# Altium PCB PCB1.PcbDoc
Units mil, origin at the board's own origin, x right, y up, seen from the top; angles counter-clockwise.
Board outline 2750 x 2515 mil, 4 copper layers (Top Layer, GND, VCC, Bottom Layer), stack 23.756 mil thick; 13 components, 9 nets, 221 pads, 11 vias.
Unrouted connection lines stored in the file: 18.
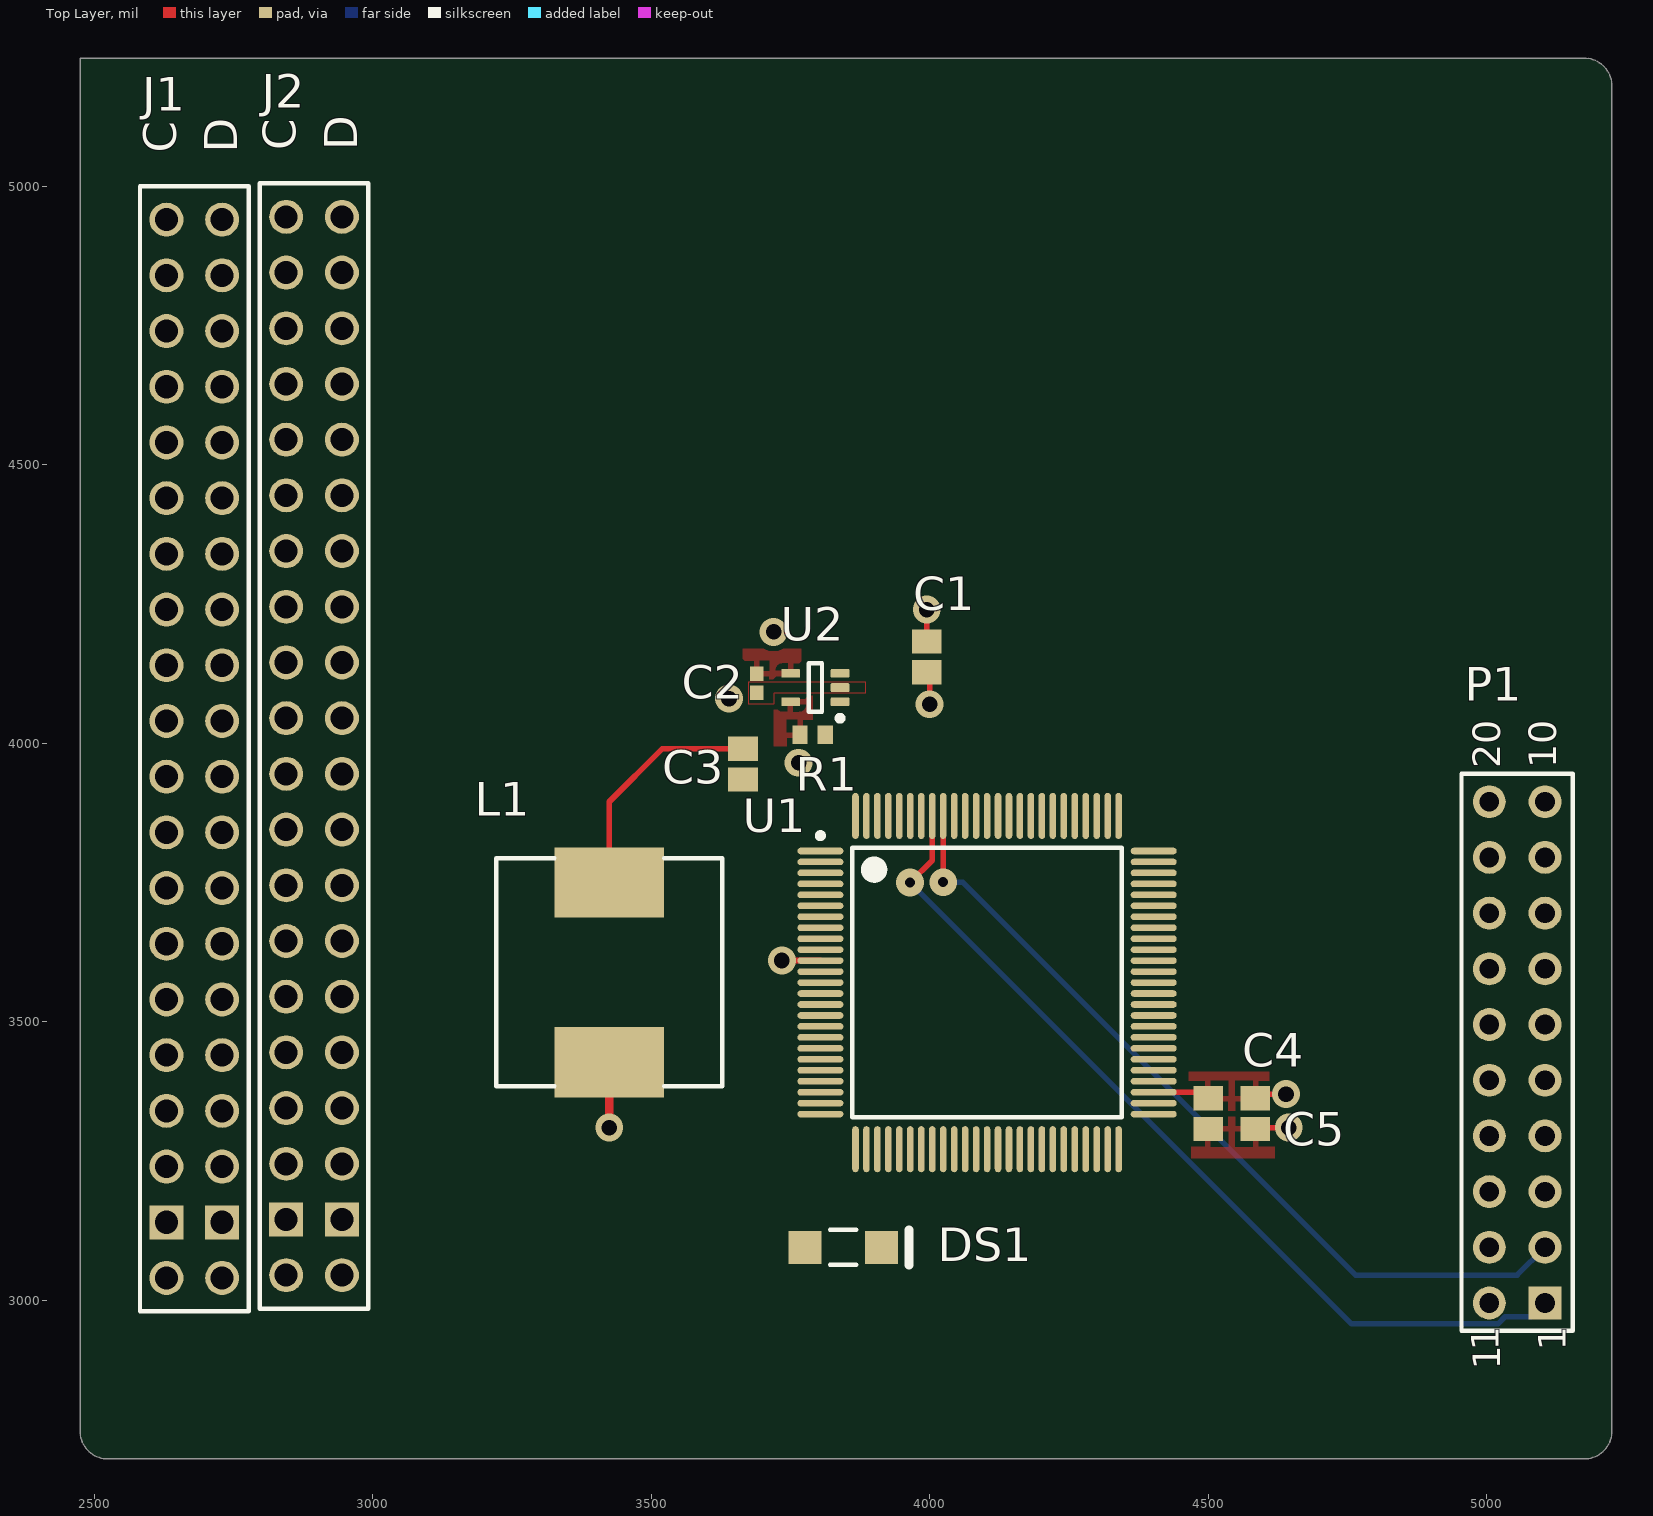
[diagram p0: Top Layer view]
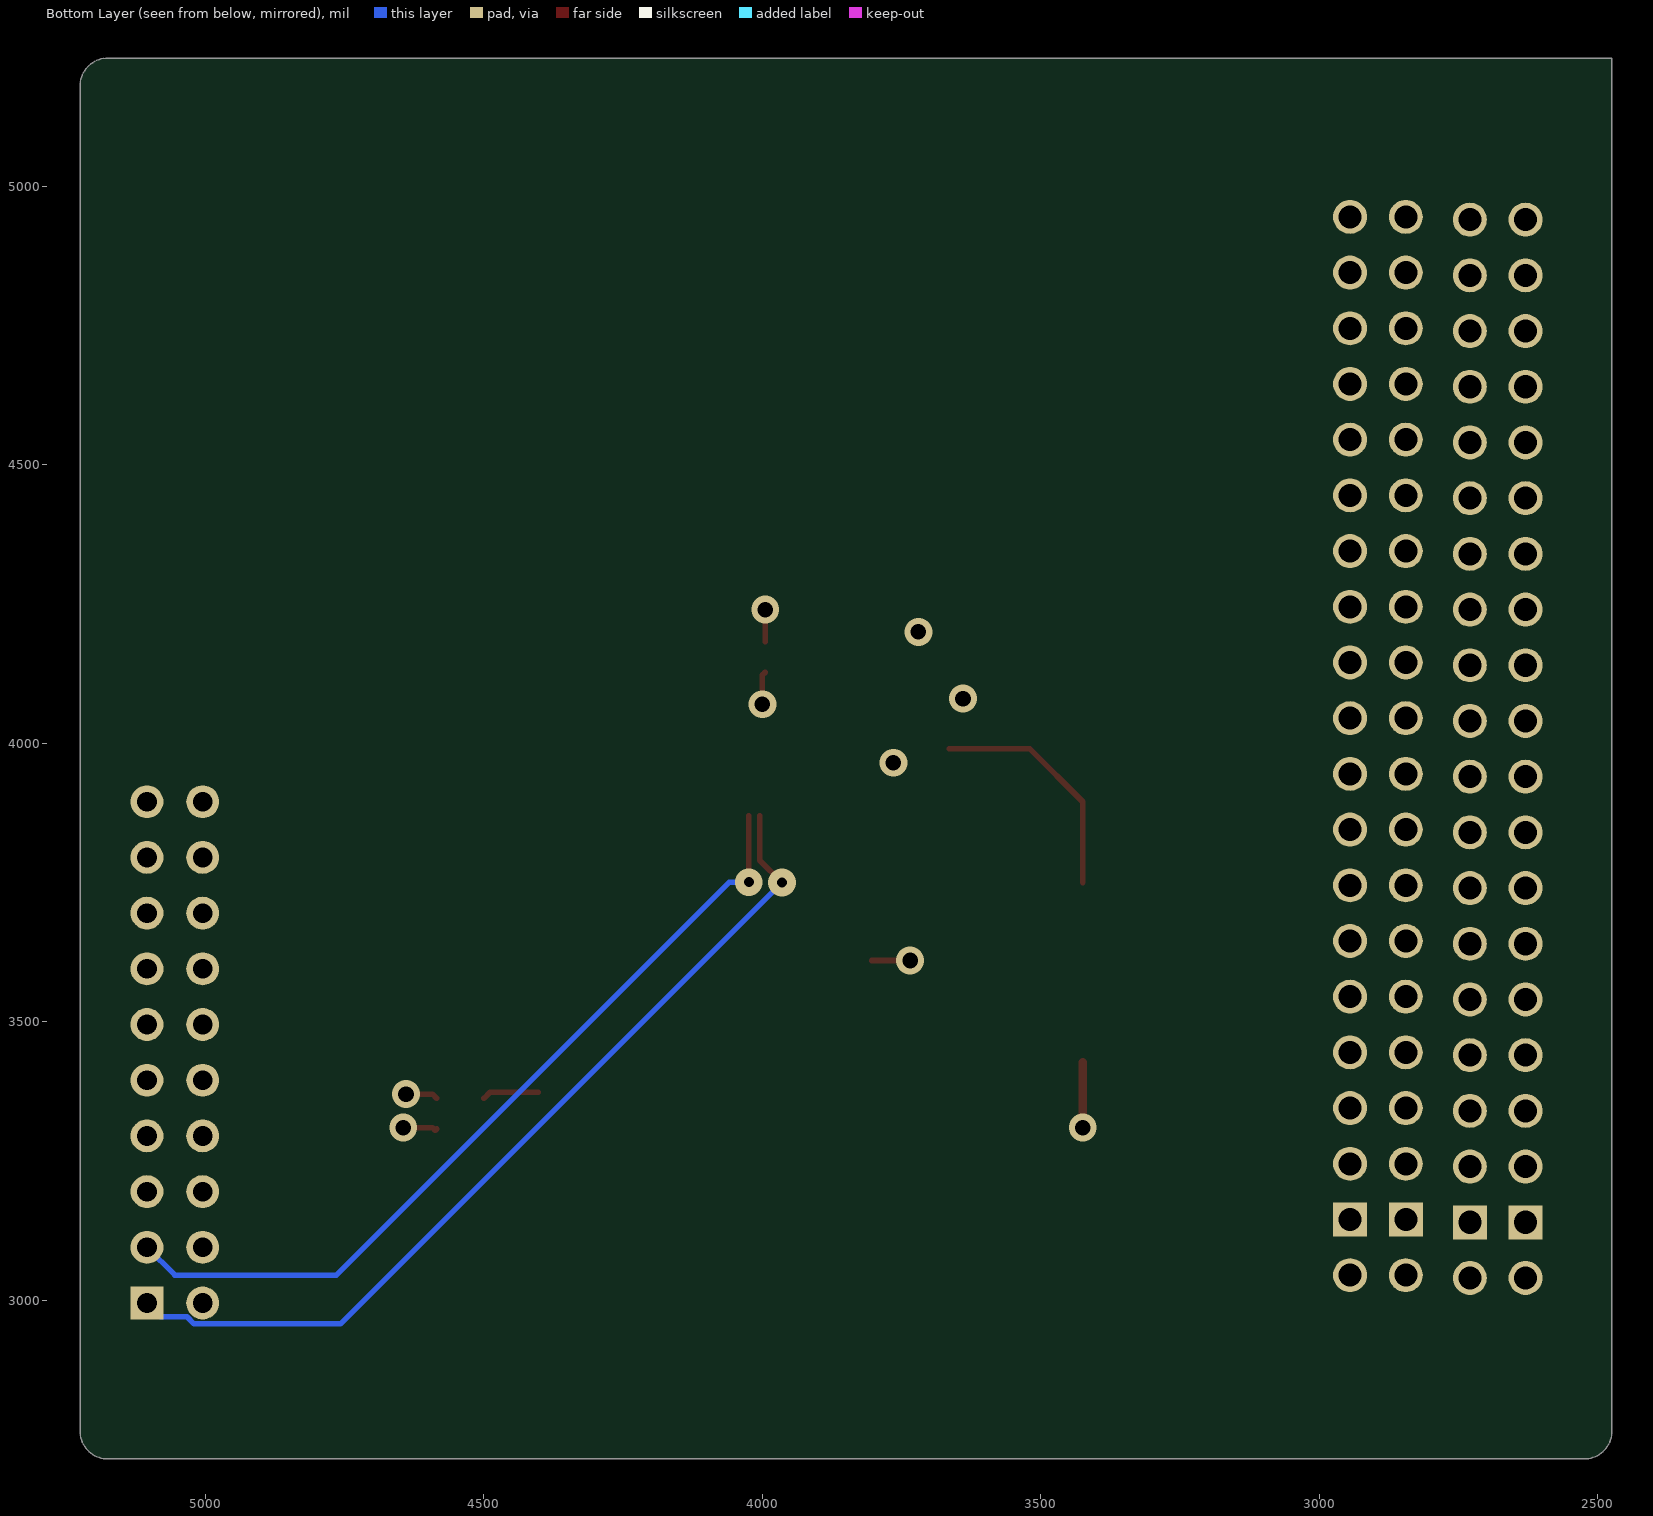
[diagram p1: Bottom Layer view, seen from below]
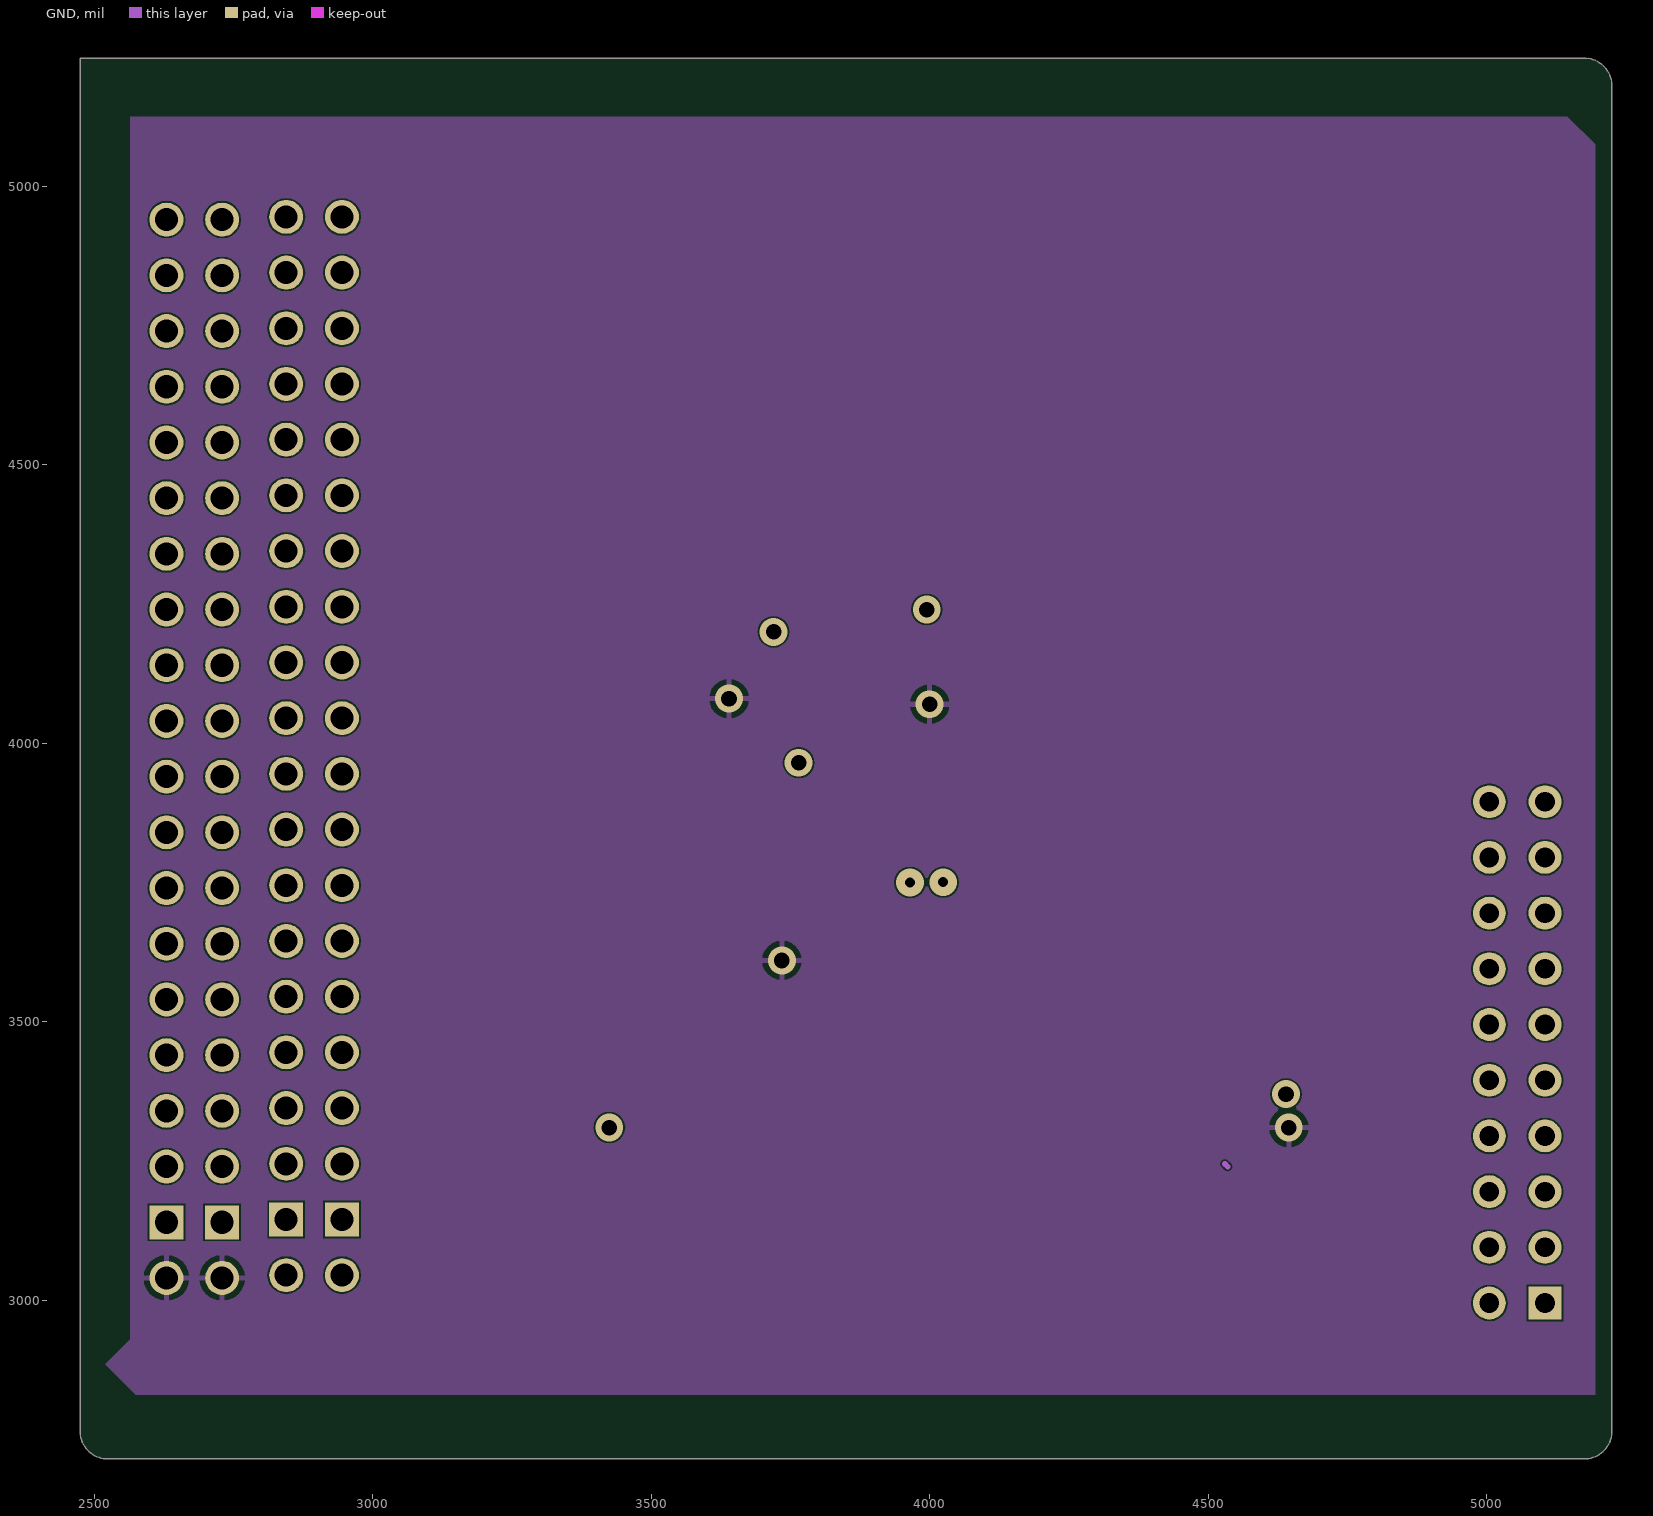
[diagram p2: GND]
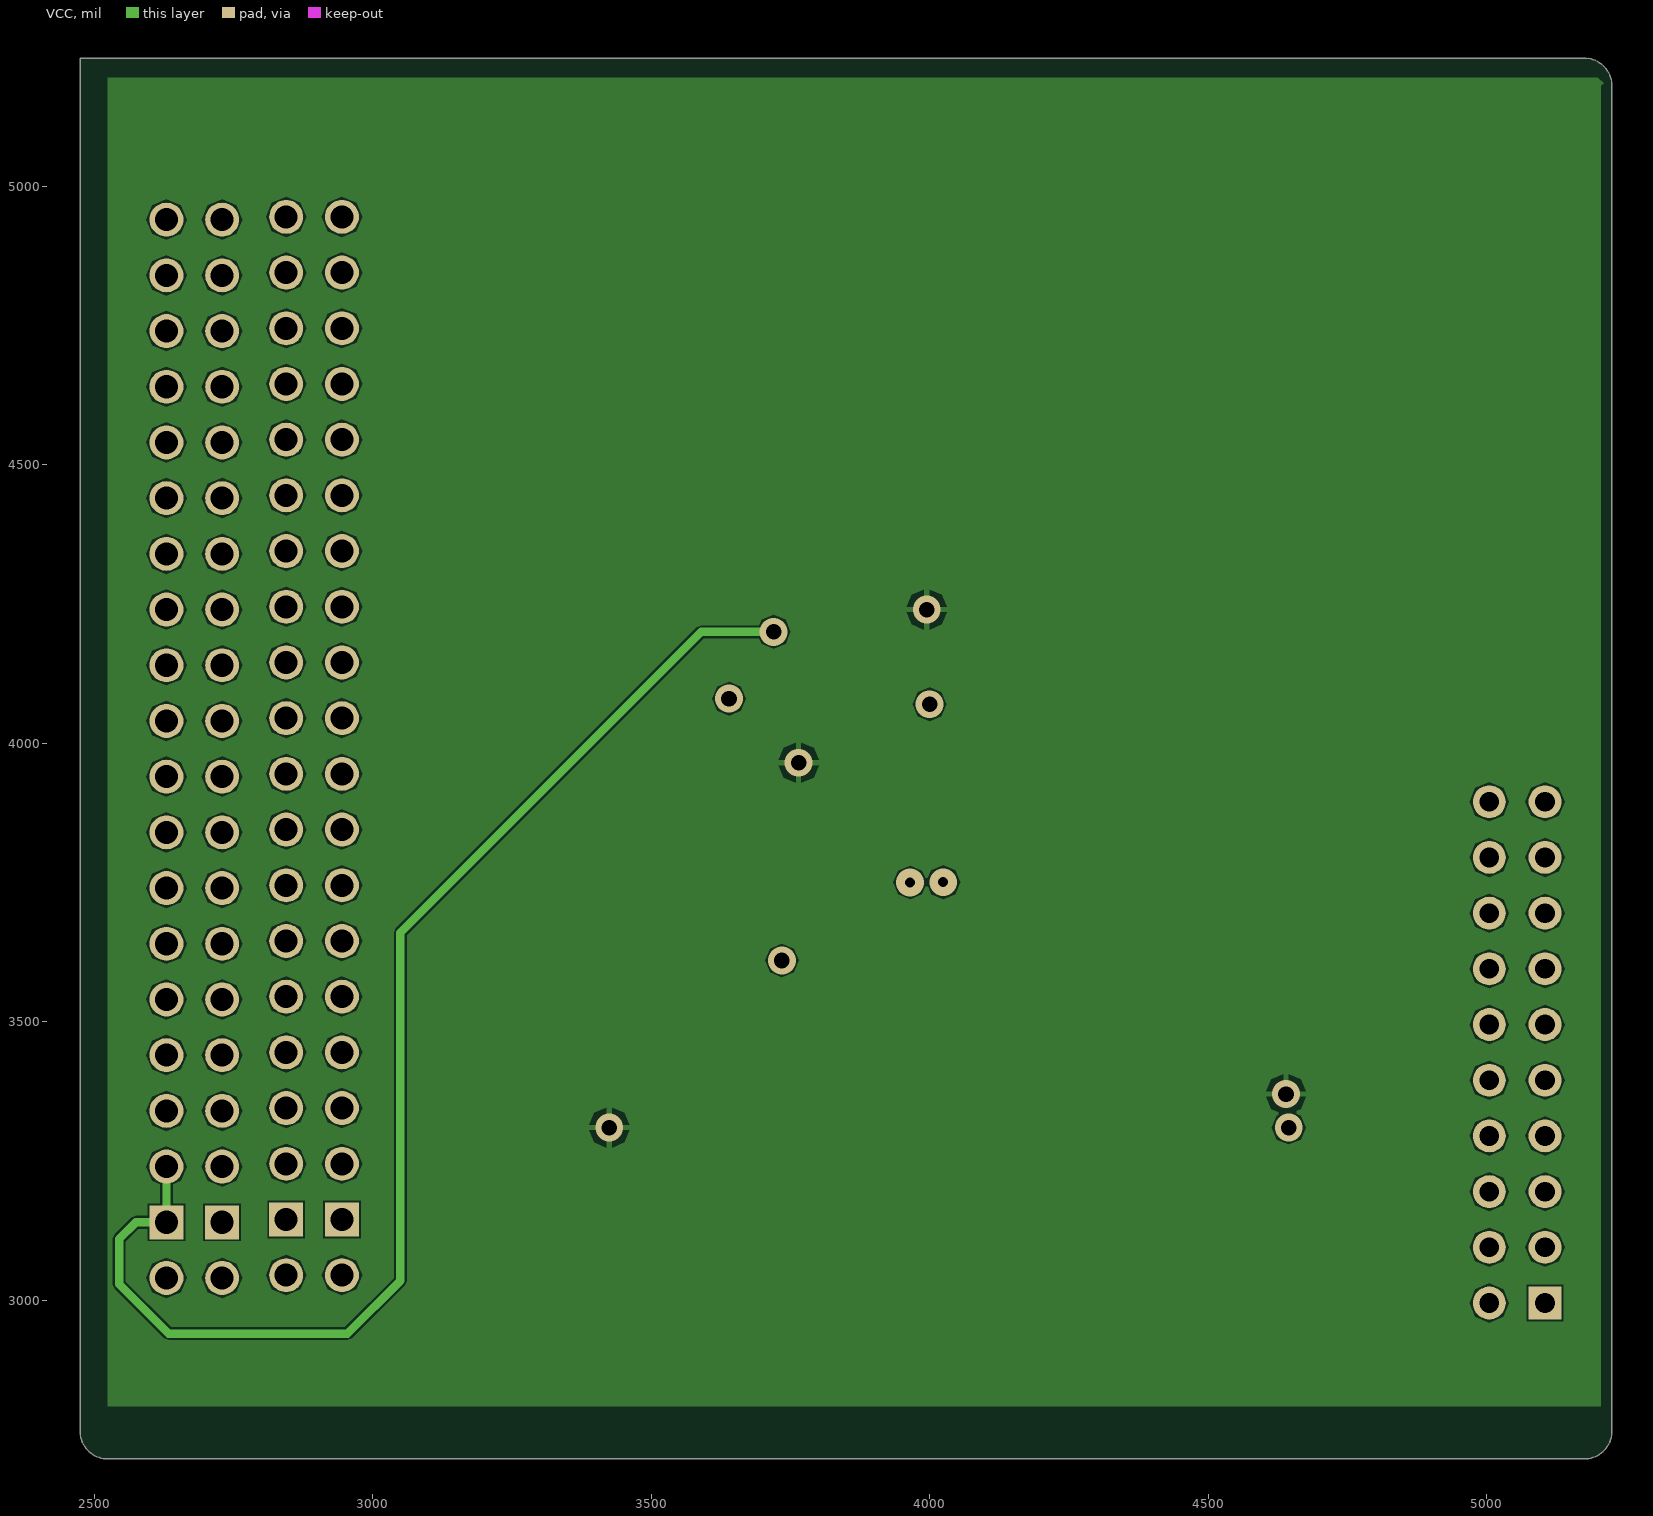
[diagram p3: VCC]

## Layer stack, top to bottom
Top Solder: solder mask 0.4, Solder Resist, Dk 3.5
Top Layer: signal copper 1.4
Dielectric 2: prepreg 2.8, PP-006, Dk 4.1
GND: signal copper 1.3779
Dielectric 1: dielectric 12.6, FR-4, Dk 4.8
VCC: signal copper 1.3779
Dielectric 3: prepreg 2.8, PP-006, Dk 4.1
Bottom Layer: signal copper 1.4
Bottom Solder: solder mask 0.4, Solder Resist, Dk 3.5

## Board outline
2525,2715 cw(c2525,2765) 2475,2765 2475,5230 5175,5230 cw(c5175,5180) 5225,5180 5225,2765 cw(c5175,2765) 5175,2715

## Design rules (kind name [scope] priority, off if disabled: settings)
Clearance CLEARANCE_11 [InNamedPolygon('GND_L01_P020')] p1: gap=10 ignorepadtopadclearanceinfootprint=FALSE except(0: Arc-Hole Track-Hole SMDPad-Hole THPad-Hole Via-Hole Fill-Hole Poly-Hole Region-Hole Text-Hole; 3: Arc-Arc Arc-Track Arc-THPad Track-Track Track-THPad)
Clearance Clearance_10 [InNamedPolygon('GND_L01_P020')] p2: gap=10 ignorepadtopadclearanceinfootprint=FALSE except(0: Arc-Hole Track-Hole SMDPad-Hole THPad-Hole Via-Hole Fill-Hole Poly-Hole Region-Hole Text-Hole; 3: Arc-THPad)
Clearance Clearance_9 [InNamedPolygon('VCC_REG_L01_P074')] p3: gap=10 ignorepadtopadclearanceinfootprint=TRUE except(0: Arc-Hole Track-Hole SMDPad-Hole THPad-Hole Via-Hole Fill-Hole Poly-Hole Region-Hole Text-Hole)
Clearance Clearance_8 [InNamedPolygon('VCC_REG_L01_P074')] p4: gap=0 ignorepadtopadclearanceinfootprint=FALSE
Clearance Clearance_7 [InNamedPolygon('VCC_L01_P026')] p5: gap=3 ignorepadtopadclearanceinfootprint=FALSE
Clearance Clearance_6 [InNamedPolygon('GND_L02_P000')] p6: gap=4 ignorepadtopadclearanceinfootprint=TRUE
Clearance Clearance_5 [InNamedPolygon('GND_L02_P000')] p7: gap=4 ignorepadtopadclearanceinfootprint=FALSE
Clearance Clearance_4 [InNamedPolygon('VCC_L03_P001')] p8: gap=4 ignorepadtopadclearanceinfootprint=FALSE
Clearance Clearance_3 [InNamedPolygon('GND_L02_P000')] p9: gap=3 ignorepadtopadclearanceinfootprint=FALSE
Clearance Clearance_2 [InNamedPolygon('VCC_L03_P001')] p10: gap=4 ignorepadtopadclearanceinfootprint=FALSE
Clearance Clearance_1 [InNamedPolygon('GND_L02_P000')] p11: gap=4 ignorepadtopadclearanceinfootprint=FALSE
Clearance [All] p12: gap=3 ignorepadtopadclearanceinfootprint=FALSE
PolygonConnect [All] p1: connectstyle=Relief reliefconductorwidth=10 reliefentries=4 polygonreliefangle="90 Angle" airgapwidth=10
RoomDefinition Sheet2 [InComponentClass('Sheet2')] p1: confinementstyle=ConfineIn formatcopy=TRUE lockcomponents=FALSE outline 2415,2785 5230,2785 5230,5235 2415,5235
RoutingVias [All] p1: holewidth=28 width=50 viastyle="Through Hole" minholewidth=28 minwidth=50 maxholewidth=28 maxwidth=50
SolderMaskExpansion [All] p1: expansion=4
Width [InNet('VCC')] p1: maxlimit=25 minlimit=10 preferedwidth=15
30 further rules are at their usual default settings.

## Components (designator, comment, footprint, x,y, rotation, side; value= is the part's Value field where it differs from the comment)
C1 "C0805C474K4RACTU" CAPC2013X140X50LL20T25 3995,4155 r90 top
C2 "GRM155R61A105KE15D" CAPC1005X55X25NL05T10 3690,4107.68 r90 top
C3 "C0805C474K4RACTU" CAPC2013X140X50LL20T25 3665,3962.44 r90 top
C4 "C0805C474K4RACTU" CAPC2013X140X50LL20T25 4585,3335 r90 top
C5 "C0805C474K4RACTU" CAPC2013X140X50LL20T25 4500,3335 r90 top
DS1 "HSMH-C150" AVAG-HSMX-C150_V 3845,3095 r0 top
J1 "PC104-CN-2P-F-R40" BTB2-54-V40F-04 2630,3140 r90 top
J2 "PC104-CN-2P-F-R40" BTB2-54-V40F-04 2845,3145 r90 top
L1 "7687714681" 1060 3425.01,3588.59 r0 top
P1 "Header 10" HDR2X10_CEN 5105,2995 r90 top
R1 "CRCW0603100KFKEA" RESC1609X50X30LL10T20 3790,4015 r180 top
U1 "ATmega2560-16AU" 100A_M 4103.23,3570.32 r0 top
U2 "TPS79733DCKT" DCK0005A_N 3795,4100 r180 top

## Footprints (in the part's own frame and the unit in brackets; to place one, negate y for a bottom-side part, rotate by r counter-clockwise, add the part's x,y. Pads: shape width x height; smd on the part's side, far side on the other; paste and mask are expansions set on the pad)
100A_M [mm] "Thin QFP, 100-Leads, Body 14x14mm, Pitch 0.5mm, IPC Low Density"
  oval 2.1x0.3 smd: 1(-7.6,6) 2(-7.6,5.5) 3(-7.6,5) 4(-7.6,4.5) 5(-7.6,4) 6(-7.6,3.5) 7(-7.6,3) 8(-7.6,2.5) 9(-7.6,2) 10(-7.6,1.5) 11(-7.6,1) 12(-7.6,0.5) 13(-7.6,0) 14(-7.6,-0.5) 15(-7.6,-1) 16(-7.6,-1.5) 17(-7.6,-2) 18(-7.6,-2.5) 19(-7.6,-3) 20(-7.6,-3.5) 21(-7.6,-4) 22(-7.6,-4.5) 23(-7.6,-5) 24(-7.6,-5.5) 25(-7.6,-6) 51(7.6,-6) 52(7.6,-5.5) 53(7.6,-5) 54(7.6,-4.5) 55(7.6,-4) 56(7.6,-3.5) 57(7.6,-3) 58(7.6,-2.5) 59(7.6,-2) 60(7.6,-1.5) 61(7.6,-1) 62(7.6,-0.5) 63(7.6,0) 64(7.6,0.5) 65(7.6,1) 66(7.6,1.5) 67(7.6,2) 68(7.6,2.5) 69(7.6,3) 70(7.6,3.5) 71(7.6,4) 72(7.6,4.5) 73(7.6,5) 74(7.6,5.5) 75(7.6,6)
  oval 0.3x2.1 smd: 26(-6,-7.6) 27(-5.5,-7.6) 28(-5,-7.6) 29(-4.5,-7.6) 30(-4,-7.6) 31(-3.5,-7.6) 32(-3,-7.6) 33(-2.5,-7.6) 34(-2,-7.6) 35(-1.5,-7.6) 36(-1,-7.6) 37(-0.5,-7.6) 38(0,-7.6) 39(0.5,-7.6) 40(1,-7.6) 41(1.5,-7.6) 42(2,-7.6) 43(2.5,-7.6) 44(3,-7.6) 45(3.5,-7.6) 46(4,-7.6) 47(4.5,-7.6) 48(5,-7.6) 49(5.5,-7.6) 50(6,-7.6) 76(6,7.6) 77(5.5,7.6) 78(5,7.6) 79(4.5,7.6) 80(4,7.6) 81(3.5,7.6) 82(3,7.6) 83(2.5,7.6) 84(2,7.6) 85(1.5,7.6) 86(1,7.6) 87(0.5,7.6) 88(0,7.6) 89(-0.5,7.6) 90(-1,7.6) 91(-1.5,7.6) 92(-2,7.6) 93(-2.5,7.6) 94(-3,7.6) 95(-3.5,7.6) 96(-4,7.6) 97(-4.5,7.6) 98(-5,7.6) 99(-5.5,7.6) 100(-6,7.6)
  silkscreen extent -7.72,-6.15 6.15,6.82, body extent -7,-7 7,7, height 1.6
1060 [mm] "Precision Wire Wound Inductor, 2-Leads, Body 10.0x10.0mm, IPC Medium Density"
  rect 5x3.2 smd: 1(0,4.1) 2(0,-4.1)
  silkscreen extent -5.15,-5.2 5.15,5.2, body extent -6,-6 6,6, height 5.65
AVAG-HSMX-C150_V [mm] "SMD, 2-Leads, Body 3.2x1.6mm"
  rect 1.5x1.5 smd: 1(-1.75,0) 2(1.75,0)
  silkscreen extent -0.6,-0.8 3,0.8, body extent -1.6,-0.8 1.6,0.8, height 1.1
BTB2-54-V40F-04 [mm] "Board-to-Board Connector, PC104 CD ISA, Stackthrough, Vertical, 2-Row, 40-Postion, Pitch 2.54mm, Receptacle"
  round 1.55 hole 1.05: C0(-2.54,0) C2(2.54,0) C3(5.08,0) C4(7.62,0) C5(10.16,0) C6(12.7,0) C7(15.24,0) C8(17.78,0) C9(20.32,0) C10(22.86,0) C11(25.4,0) C12(27.94,0) C13(30.48,0) C14(33.02,0) C15(35.56,0) C16(38.1,0) C17(40.64,0) C18(43.18,0) C19(45.72,0) D0(-2.54,-2.54) D2(2.54,-2.54) D3(5.08,-2.54) D4(7.62,-2.54) D5(10.16,-2.54) D6(12.7,-2.54) D7(15.24,-2.54) D8(17.78,-2.54) D9(20.32,-2.54) D10(22.86,-2.54) D11(25.4,-2.54) D12(27.94,-2.54) D13(30.48,-2.54) D14(33.02,-2.54) D15(35.56,-2.54) D16(38.1,-2.54) D17(40.64,-2.54) D18(43.18,-2.54) D19(45.72,-2.54)
  rect 1.55x1.55 hole 1.05: C1(0,0) D1(0,-2.54)
  silkscreen extent -4.07,-3.74 47.24,1.21, body extent -4.14,-3.74 47.32,1.21, height 11.05
CAPC1005X55X25NL05T10 [mm] "Chip Capacitor, 2-Leads, Body 1.00x0.50mm, IPC Medium Density"
  rect 0.66x0.62 smd: 1(-0.44,0) 2(0.44,0)
  body extent -0.53,-0.28 0.53,0.27, height 0.55
CAPC2013X140X50LL20T25 [mm] "Chip Capacitor, 2-Leads, Body 2.00x1.25mm, IPC High Density"
  rect 1.1x1.35 smd: 1(-0.7,0) 2(0.7,0)
  body extent -1.1,-0.72 1.1,0.72, height 1.4
DCK0005A_N [mm] "SOT23, 5-Leads, Body 2.15x1.4mm, Pitch 0.65mm, IPC Medium Density"
  rrect25% 0.85x0.4 smd: 1(-1.125,0.65) 2(-1.125,0) 3(-1.125,-0.65) 4(1.125,-0.65) 5(1.125,0.65)
  silkscreen extent -1.25,-1.1 0.3,1.52, body extent -1.14,-1 1.14,1, height 0.94
HDR2X10_CEN [mm] "Connector; Header; 10x2 Position"
  rect 1.5x1.5 hole 0.9: 1(0,0)
  round 1.5 hole 0.9: 2(2.54,0) 3(5.08,0) 4(7.62,0) 5(10.16,0) 6(12.7,0) 7(15.24,0) 8(17.78,0) 9(20.32,0) 10(22.86,0) 11(0,2.54) 12(2.54,2.54) 13(5.08,2.54) 14(7.62,2.54) 15(10.16,2.54) 16(12.7,2.54) 17(15.24,2.54) 18(17.78,2.54) 19(20.32,2.54) 20(22.86,2.54)
  silkscreen extent -1.27,-1.27 24.13,3.81
RESC1609X50X30LL10T20 [mm] "Chip Resistor, 2-Leads, Body 1.55x0.85mm, IPC High Density"
  rect 0.7x0.85 smd: 1(-0.575,0) 2(0.575,0)
  body extent -0.82,-0.48 0.82,0.48, height 0.5

## Part data
C1 C3 C4 C5: library part CMP-2007-03296-1, Manufacturer=Kemet, Part Number=C0805C474K4RACTU
C2: library part CMP-2008-04556-1, Manufacturer=Murata, Part Number=GRM155R61A105KE15D
DS1: library part CMP-2000-06426-1, "LED Uni-Color Red, 65 mW, 25 mA, -40 to 85 degC, 2-Pin SMD, RoHS, Tape and Reel", Emitting Color=Red, Forward Current=25mA, Forward Voltage=2.6V, Manufacturer=Avago, Operating Temperature Classification=Industrial, Operating Temp Range=-40Cto85C, Package Description="2-Pin Surface Mount Device, Body 3.2 x 1.6 mm", Package Reference=HSMX-C150, Package Type=ChipLed, Power Dissipation=78W, Reverse Voltage=5V, Test Current (It)=20mA, Chip Material=GaAlAs, Datasheet URL=http://media.digikey.com/pdf/Data%20Sheets/Avago%20PDFs/HSMz-Czzz.pdf, Datasheet Version=03/2012, DELETED=Compliant, Dominant Wave Length=639nm, High Brightness=No, Lens Dimensions=2x1.6x0.6mm, Lens Type=ColorlessDiffused, Luminous Intensity=17mcd, Lum Intensity=17mcd, Main Category=ChipLED, Manufacturer URL=http://www.avagotech.com/, Mounting=SurfaceMount, Mounting Technology=SurfaceMount, Number of  Elements=1, Packaging=TapeandReel, Peak Wavelength=660nm, Pin Count=2, Product Depth (mm)=1.6mm, Product Height (mm)=1.1mm, Product Length (mm)=3.2mm, Rad Hardened=No, Shape Type=Rectangular, Type=Uni-Color, Viewing Angle=170deg
J1 J2: library part CMP-0001-00107-1, "Board-to-Board Connector, PC104 CD ISA, Stackthrough, Vertical, 2-Row, 40-Postion, Pitch 2.54mm, Receptacle", Package Reference=BTB2-54-V40F-04, ClassName="Board Template Connector", Mating Connector="Harwin-M20-6102005 (stackthrough)", Publisher=Altium
L1: library part CMP-1387-00003-1, "SMD Power Inductor WE-PD HV, L=680 µH", Inductance="680 µH", Manufacturer="Wuerth Elektronik", ComponentLink1Description="Manufacturer URL", ComponentLink1URL=http://www.we-online.com, ComponentLink2Description=Datasheet, ComponentLink2URL=http://www.we-online.de/katalog/media/pdf/7687714681.pdf, PackageReference=1060, PartNumber=7687714681
P1: "Header, 10-Pin", LatestRevisionDate=17-Jul-2002, LatestRevisionNote="Re-released for DXP Platform.", Publisher="Altium Limited"
R1: library part CMP-2000-03820-1, Manufacturer="Vishay Dale", Part Number=CRCW0603100KFKEA
U1: library part CMP-0095-00210-2, "8-bit AVR Microcontroller, 4.5-5.5V, 16MHz, 256KB Flash, 4KB EEPROM, 8KB SRAM, 86 GPIO pins, 100-pin TQFP, Industrial Grade (-40°C to 85°C), Pb-Free", Code_JEDEC=MS-026-AED, ComponentLink1Description="Manufacturer URL", ComponentLink1URL=http://www.atmel.com/, ComponentLink2Description="ATmega640/1280/1281/2560/2561 Datasheet", ComponentLink2URL=http://www.atmel.com/dyn/resources/prod_documents/doc2549.pdf, ComponentLink3Description="ATmega640/1280/1281/2560/2561 Summary", ComponentLink3URL=http://www.atmel.com/dyn/resources/prod_documents/2549S.pdf, DatasheetVersion="revN, May-2011", PackageDescription="100-Pin Thin Profile Plastic Quad Flat Pack (TQFP), 14 x 14 x 1.0 mm Body, 0.5 mm Pitch", PackageReference=100A, PackageVersion="revD, Oct-2010", RevisionNote="DatasheetVersion & PackageVersion updated. URLs added."
U2: library part CMP-0394-00889-2, "Single Output LDO, 50 mA, Fixed 3.3 V Output, 1.8 to 5.5 V Input, with Low IQ, 5-pin SC70 (DCK), -40 to 85 degC, Green (RoHS & no Sb/Br)", Manufacturer="Texas Instruments", Power Good=TRUE, Rating=Catalog, Accuracy(%)=4, Code_JEDEC=MO-203, ComponentLink1Description="Manufacturer URL", ComponentLink1URL=http://www.ti.com/, ComponentLink2Description=Datasheet, ComponentLink2URL=http://www.ti.com/general/docs/lit/getliterature.tsp?genericPartNumber=TPS79733&fileType=pdf, ComponentLink3Description="Package Specification", ComponentLink3URL=http://www.ti.com/litv/pdf/mpds025f, DatasheetVersion=SLVS332H, Eco-Plan="Green (RoHS & no Sb/Br)", Fixed Output Options(V)=3.3, Iout(Max)(A)=0.05, Iq(Typ)(mA)=0.001, Mounting Technology="Surface Mount", PackageDescription="5-Pin Plastic Small-Outline, Body 2 x 1.25 mm, Pitch 0.65 mm", PackageReference=DCK0005A, PackageVersion=4093553-3/G, PartNumber=TPS79733DCKT, SubFamily="Single Channel LDO", Vdo(Typ)(mV)=105, Vin(Max)(V)=5.5, Vin(Min)(V)=1.8, Vout Adj(Max)(V)=3.3, Vout Adj(Min)(V)=3.3

## Via types
v1: diameter 50, hole 28, Top Layer to Bottom Layer, 9 vias
v2: diameter 50, hole 18, Top Layer to Bottom Layer, 2 vias

## Nets (pads, with @x,y where several pads share a name; then routed paths per layer and width w, separated by ;. In a path a pad name is that pad's centre, name@x,y a point inside that pad or via, vN(x,y) a via of type N, cw(c..) or ccw(c..) an arc to the next point about the centre after c; other vN are vias at no path point)
AVCC: C3.2 L1.1 U1.100 | length 424.4
  Top Layer w10: L1.1 3425,3895 3520,3990 C3.2
GND: C1.1 C2.1 C3.1 C4.1 C5.1 DS1.2 J1.C0 J1.D0 U1.11 U1.98 U1.99 U2.2 | length 221.5
  Top Layer w10: J1.D0@2721.63,3048.37 J1.D0 ; v1(3640,4080) v1@3650.82,4080 ; v1(3735,3610) 3803.7,3610 U1.11 ; C1.1 4000,4122.44 v1(4000,4070) ; C4.1 4587.44,3305 4592.44,3310 v1(4645,3310)
  GND w15: v1@4640,3305 v1(4645,3310)
NetP1_1: P1.1 U1.93 | length 1619.8
  Top Layer w10: v2(3965,3750) 4004.8,3789.8 U1.93
  Bottom Layer w10: v2(3965,3750) 4757.53,2957.47 5020.54,2957.47 5033.54,2970.47 5080.47,2970.47 P1.1
NetP1_2: P1.2 U1.92 | length 1512.5
  Top Layer w10: v2(4024.49,3750.51) U1.92
  Bottom Layer w10: v2(4024.49,3750.51) 4059.49,3750.51 4765,3045 5055,3045 P1.2
NetP1_3: P1.3 U1.91
NetP1_4: P1.4 U1.90
reset: R1.1 U1.30 U2.1
VCC: C2.2 DS1.1 J1.C1 J1.C2 U2.4 | length 2392.4
  Top Layer w15: v1@3710.53,4190 3720,4199.47 v1(3720,4200)
  VCC w15: J1.C2 J1.C1 2575,3140 2545,3110 2545,3028.79 2633.79,2940 2955,2940 3050,3035 3050,3660 3590,4200 v1(3720,4200)
VCC_reg: C1.2 C4.2 C5.2 L1.2 R1.2 U1.53 U2.5 | length 363.2
  Top Layer w10: C1.2 v1(3995,4240) ; U1.53 4489.09,3373.46 C5.2 ; C4.2 4592.44,3370 v1(4640,3370) v1@4627.56,3357.56
  Top Layer w15: v1(3425,3310) L1.2
  VCC w10: v1(3995,4240) v1@4002.65,4232.35
  other v1: 3765,3965
pads on no net: J1.C3 J1.C4 J1.C5 J1.C6 J1.C7 J1.C8 J1.C9 J1.C10 J1.C11 J1.C12 J1.C13 J1.C14 J1.C15 J1.C16 J1.C17 J1.C18 J1.C19 J1.D1 J1.D2 J1.D3 J1.D4 J1.D5 J1.D6 J1.D7 J1.D8 J1.D9 J1.D10 J1.D11 J1.D12 J1.D13 J1.D14 J1.D15 J1.D16 J1.D17 J1.D18 J1.D19 J2.C0 J2.C1 J2.C2 J2.C3 J2.C4 J2.C5 J2.C6 J2.C7 J2.C8 J2.C9 J2.C10 J2.C11 J2.C12 J2.C13 J2.C14 J2.C15 J2.C16 J2.C17 J2.C18 J2.C19 J2.D0 J2.D1 J2.D2 J2.D3 J2.D4 J2.D5 J2.D6 J2.D7 J2.D8 J2.D9 J2.D10 J2.D11 J2.D12 J2.D13 J2.D14 J2.D15 J2.D16 J2.D17 J2.D18 J2.D19 P1.5 P1.6 P1.7 P1.8 P1.9 P1.10 P1.11 P1.12 P1.13 P1.14 P1.15 P1.16 P1.17 P1.18 P1.19 P1.20 U1.1 U1.2 U1.3 U1.4 U1.5 U1.6 U1.7 U1.8 U1.9 U1.10 U1.12 U1.13 U1.14 U1.15 U1.16 U1.17 U1.18 U1.19 U1.20 U1.21 U1.22 U1.23 U1.24 U1.25 U1.26 U1.27 U1.28 U1.29 U1.31 U1.32 U1.33 U1.34 U1.35 U1.36 U1.37 U1.38 U1.39 U1.40 U1.41 U1.42 U1.43 U1.44 U1.45 U1.46 U1.47 U1.48 U1.49 U1.50 U1.51 U1.52 U1.54 U1.55 U1.56 U1.57 U1.58 U1.59 U1.60 U1.61 U1.62 U1.63 U1.64 U1.65 U1.66 U1.67 U1.68 U1.69 U1.70 U1.71 U1.72 U1.73 U1.74 U1.75 U1.76 U1.77 U1.78 U1.79 U1.80 U1.81 U1.82 U1.83 U1.84 U1.85 U1.86 U1.87 U1.88 U1.89 U1.94 U1.95 U1.96 U1.97 U2.3
copper on no net: | length 12.1
  GND w10: 4530,3245 4535,3240
  VCC w10: 44785,975 44785,980

## Polygon pours and split planes (outlines as drawn)
no net on VCC "NONET_L03_P086" (solid, pour order 86): 3825,4065
no net on VCC "NONET_L03_P084" (solid, pour order 84): 3825,4065
VCC_reg on VCC "VCC_REG_L03_P008" (solid, pour order 8): 2525,5195 2525,2810 5205,2810 5205,5180 5210,5185 5200,5195
GND on GND "GND_L02_P018" (solid, pour order 18): 2565,5125 5145,5125 5195,5075 5195,2830 2575,2830 2520,2885 2565,2930
GND on Top Layer "GND_L01_P078" (solid, pour order 78): 4470,3330 4620,3330 4620,3255 4470,3255
VCC_reg on Top Layer "VCC_REG_L01_P074" (solid, pour order 74): 4465,3410 4610,3410 4610,3340 4465,3340
VCC_reg on Top Layer "VCC_REG_L01_P028" (solid, pour order 28): 3720,3995 3790,3995 3790,4085 3720,4085
VCC on Top Layer "VCC_L01_P026" (solid, remove dead copper, pour order 26): 3665,4170 3770,4170 3770,4115 3765,4115 3665,4115
GND on Top Layer "GND_L01_P020" (solid, pour order 20): 3885,4110 3885,4090 3720,4090 3720,4070 3675,4070 3675,4110 3820,4110

## Other copper
VCC:
  pour cut-out: 4195,3710
  pour cut-out: 4202.5,3707.5

## Silkscreen, mask and mechanical layers (free items; w line width, h text height)
Mechanical 1:
  lines w10: 5175,2715 2525,2715 cw(c2525,2765) 2475,2765 2475,5230 5175,5230 cw(c5175,5180) 5225,5180 5225,2765

## Text inside footprints (layer, text, board x,y; h text height)
J1: Top Overlay "C" at 2647.44,5059.96 h59.06 r90; Top Overlay "D" at 2757.44,5059.96 h59.06 r90
J2: Top Overlay "C" at 2862.44,5064.96 h59.06 r90; Top Overlay "D" at 2972.44,5064.96 h59.06 r90
P1: Top Overlay "20" at 5025,3955 h50 r90; Top Overlay "10" at 5125,3955 h50 r90; Top Overlay "1" at 5021.77,2909.68 h50 r90; Top Overlay "1" at 5025,2875 h50 r90; Top Overlay "1" at 5141.77,2909.68 h50 r90